# EAGLE board LightDiming2 (EAGLE 9.5.1)
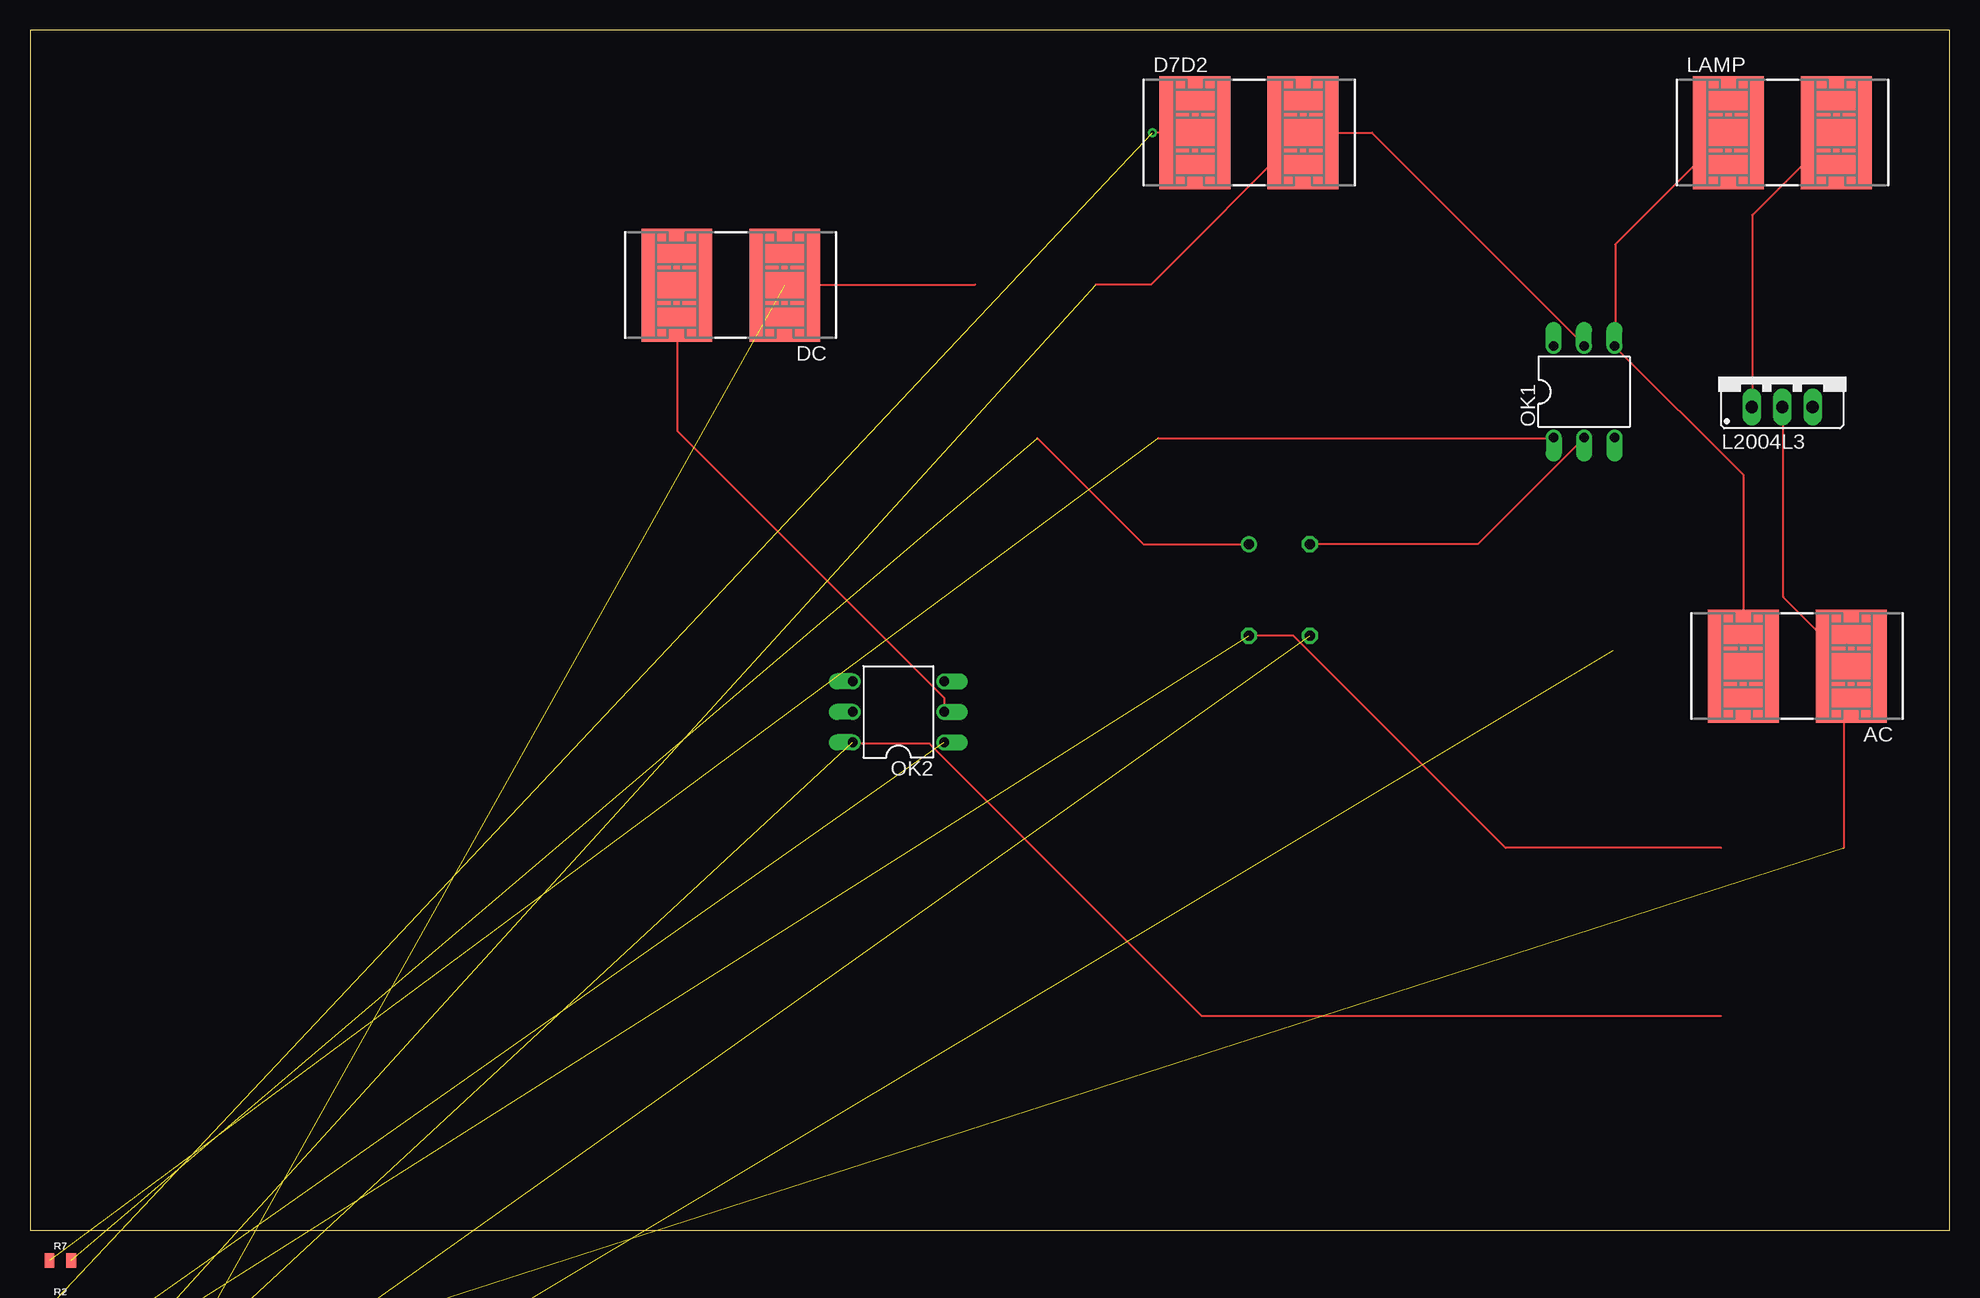
[diagram p0: board, top side]
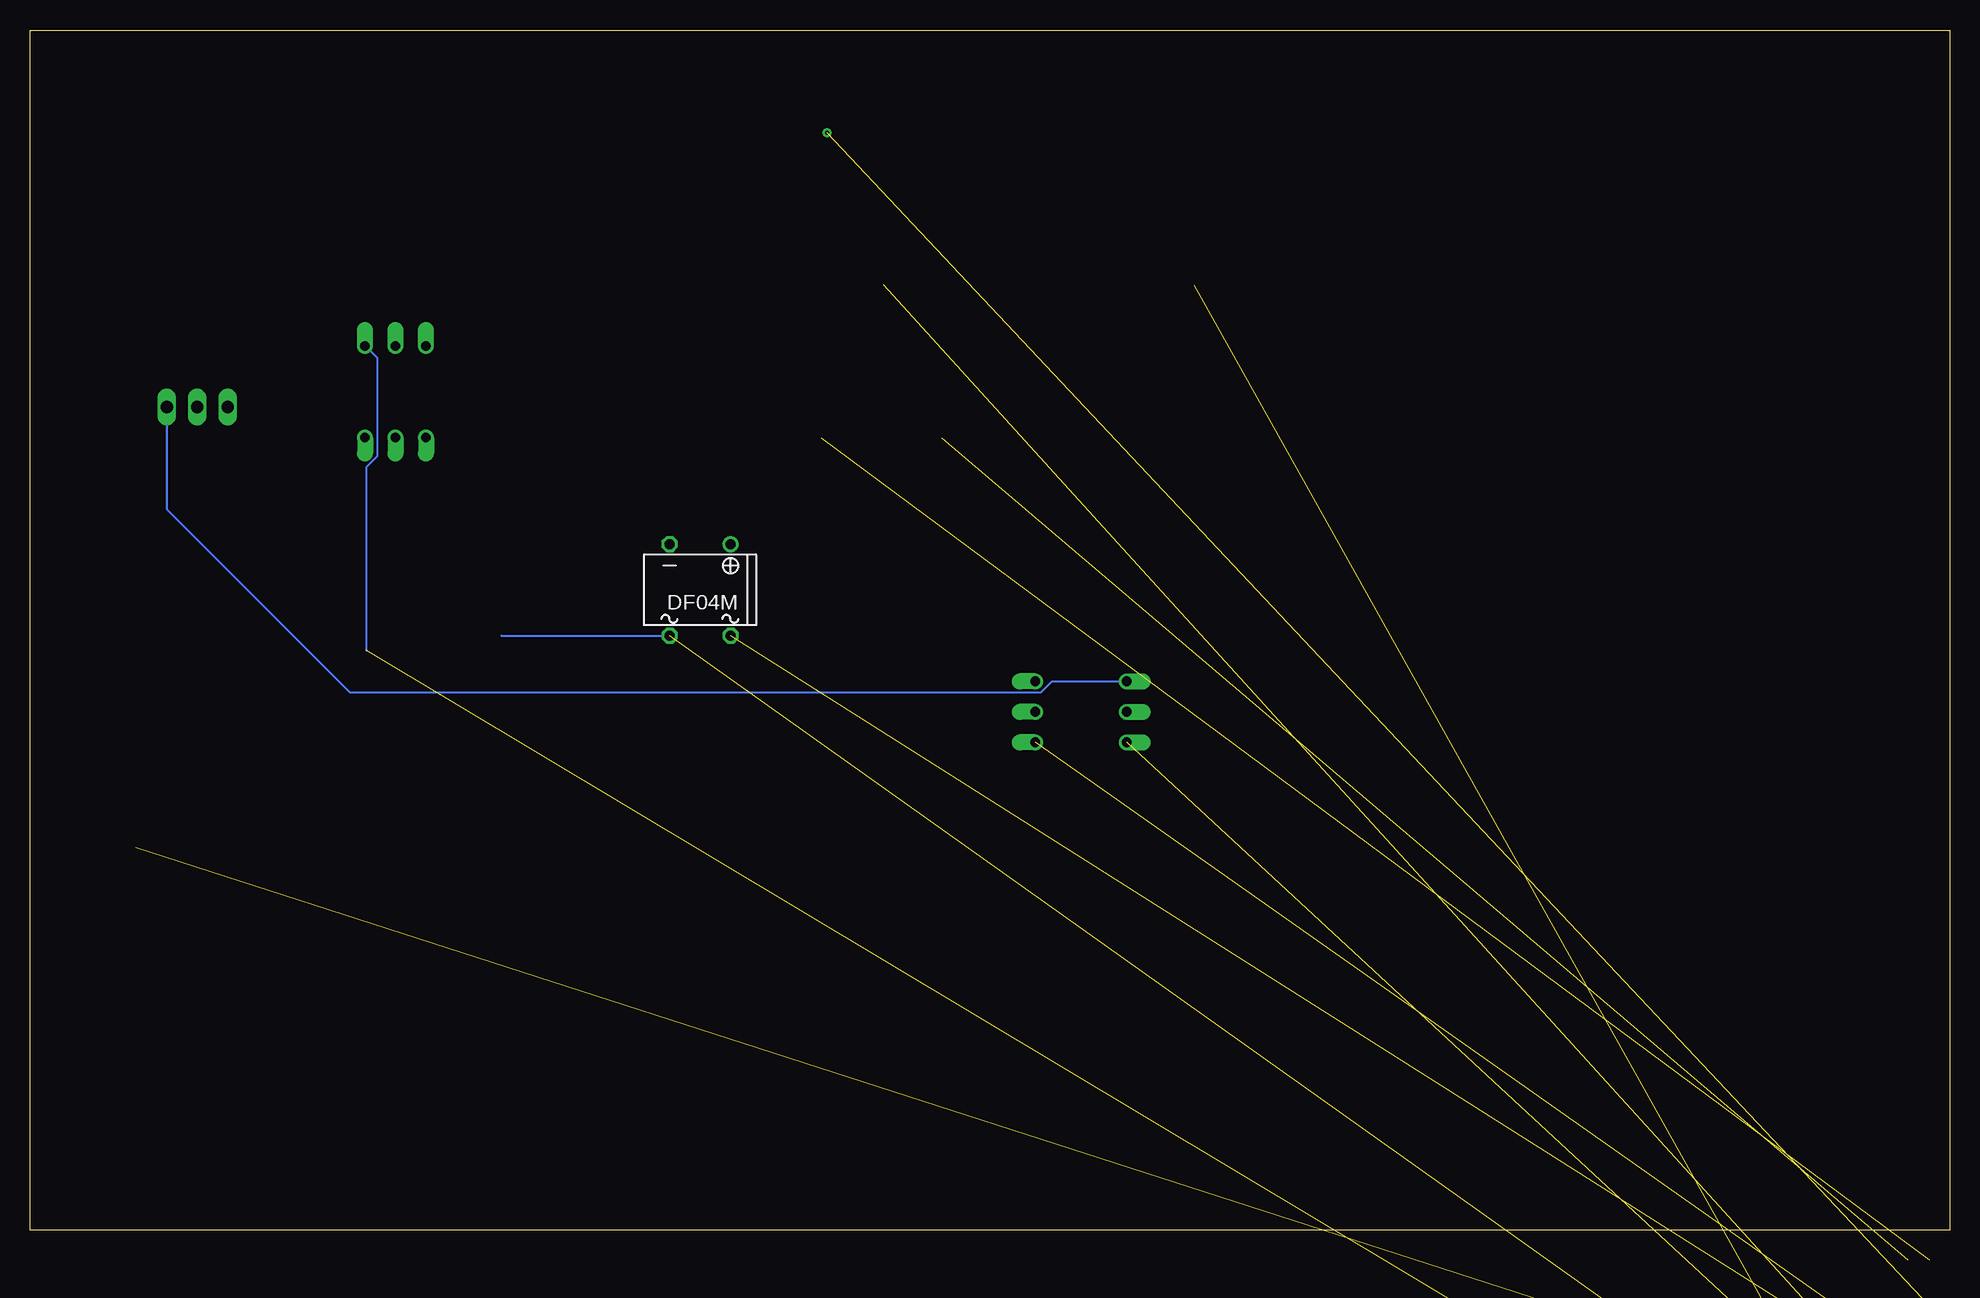
[diagram p1: board, bottom side, seen from below]

Size 160 x 100 mm. Coordinates in mm from the lower left corner, seen from the top.
Outline: 0,0 160,0 160,100 0,100 0,0
Copper layers (1*16): Top 0.035mm / dielectric 1.5mm / Bottom 0.035mm
Design rules "default": minimum track width 6mil, minimum drill 0.35mm, track to track 6mil, track to pad 6mil, pad to pad 6mil, via to via 6mil, smd to smd 6mil, copper to edge 40mil, drill to drill 6mil, minimum pad ring 10mil, minimum via ring 8mil, stop-mask expansion 4mil, vias tented up to drill 0mil, thermal gap 10mil

## Footprints (pad centres in the part's own frame; a part is rotated, then mirrored left to right if it is on the bottom)
009177002 = smd 5.9 x 9.4: 1 -4.5,0; 2 4.5,0
LED-1206 = smd 1.2 x 1.4: A -1.5,0; C 1.5,0
B-DIL = drill 0.813: + -2.54,-3.81 | drill 0.813 octagon: - 2.54,-3.81; AC1 2.54,3.81; AC2 -2.54,3.81
TO220DS = drill 1.016 long: A1 -2.54,-2.54; A2 0,-2.54; G 2.54,-2.54
DIL06 = drill 0.813 offset: 1 -2.54,-3.81; 2 0,-3.81; 3 2.54,-3.81; 4 2.54,3.81; 5 0,3.81; 6 -2.54,3.81
AXIAL-0.3 = drill 0.9 pad 1.88: P$1 -3.81,0; P$2 3.81,0
0805 = smd 0.8 x 1.2: 1 -0.9,0; 2 0.9,0

## Placement (x,y rotation side)
AC  009177002  [009177002]  147.32,46.99 180 top
D1  [LED-1206]  2.54,-10.16 0 top  (outside the outline)
D7D2  009177002  [009177002]  101.6,91.44 0 top
DC  009177002  [009177002]  58.42,78.74 180 top
DF04M  12V  [B-DIL]  104.14,53.34 180 bottom
L2004L3  TIC225S  [TO220DS]  146.05,71.12 0 top
LAMP  009177002  [009177002]  146.05,91.44 0 top
OK1  4N25M  [DIL06]  129.54,69.85 0 top
OK2  MOC3021M  [DIL06]  72.39,43.18 90 top
R1  1k  [AXIAL-0.3]  5.08,-17.78 0 top  (outside the outline)
R2  220  [0805]  2.54,-6.35 0 top  (outside the outline)
R3  1k  [AXIAL-0.3]  5.08,-21.59 0 top  (outside the outline)
R4  1k  [AXIAL-0.3]  5.08,-25.4 0 top  (outside the outline)
R6  1k  [AXIAL-0.3]  5.08,-13.97 0 top  (outside the outline)
R7  1k  [0805]  2.54,-2.54 0 top

## Library data of the parts
AC D7D2 DC LAMP = con-avx; MPN: 009177002001006; OC_FARNELL: unknown; OC_NEWARK: 09P1124
D1 = SparkFun-LED
DF04M = rectifier
L2004L3 = triac
OK1 = optocoupler; MPN: 4N25-M; OC_FARNELL: 1021349; OC_NEWARK: 98K9084
OK2 = optocoupler; MF: FAIRCHILD SEMICONDUCTOR; MPN: MOC3021-M; OC_FARNELL: 1021365; OC_NEWARK: 95B7895
R1 R3 R4 R6 = SparkFun-Resistors; PROD_ID: RES-12182
R2 R7 = SparkFun-Resistors; PROD_ID: RES-08474

## Nets
GND: AC.2 LAMP.1 OK1.4 R4.P$2
IO2: D7D2.2 OK1.5 R1.P$1
N$1: DF04M.+ R7.2
N$2: D1.A R2.2
N$3: D1.C OK2.1
N$4: D7D2.1 R2.1
N$5: DC.1 R1.P$2
N$6: OK2.6 R3.P$1
N$7: L2004L3.G OK2.4
N$8: OK1.1 R7.1
N$9: DF04M.- OK1.2
N$10: DF04M.AC1 R4.P$1
N$11: DC.2 OK2.2
N$12: AC.1 L2004L3.A2 R3.P$2 R6.P$2
N$13: DF04M.AC2 R6.P$1
N$15: L2004L3.A1 LAMP.2

## Tracks (layer width: path | path; a pad name or v marks a point on that pad's centre or on a via)
GND  (1 unrouted)
  Top 0.152: LAMP.1 141.43,91.44 132.13,82.14 132.13,73.76 OK1.4 142.8,62.94 142.8,47.09 AC.2
  Bottom 0.152: 131.98,48.31 131.98,63.55 131.06,64.47 131.06,72.69 131.98,73.61 OK1.4
IO2  (1 unrouted)
  Top 0.152: OK1.5 129.54,73.76 111.86,91.44 D7D2.2 106.07,91.44 93.42,78.79 88.85,78.79
N$1  (1 unrouted)
  Top 0.152: DF04M.+ 92.81,57.15 83.97,65.99
N$2  (1 unrouted)
N$3  (1 unrouted)
N$4  (via drill 0.35)  (1 unrouted)
  Top 0.152: D7D2.1 v93.57,91.44
N$5  (1 unrouted)
  Top 0.152: 78.79,78.79 62.94,78.79 DC.1
N$6  (1 unrouted)
  Top 0.152: 140.97,17.83 97.69,17.83 74.98,40.54 68.58,40.54 OK2.6
N$7
  Bottom 0.152: OK2.4 74.83,45.72 75.74,44.81 133.35,44.81 148.59,60.05 L2004L3.G
N$8  (1 unrouted)
  Top 0.152: 94.03,65.99 126.95,65.99 OK1.1
N$9
  Top 0.152: DF04M.- 120.7,57.15 129.54,65.99 OK1.2
N$10  (1 unrouted)
  Bottom 0.152: 120.7,49.53 DF04M.AC1
N$11
  Top 0.152: OK2.2 76.2,44.35 53.95,66.6 53.95,78.64 DC.2
N$12  (2 unrouted)
  Top 0.152: L2004L3.A2 146.15,68.58 146.15,52.73 151.79,47.09 AC.1 151.79,46.94 151.18,46.33 151.18,31.85
N$13  (1 unrouted)
  Top 0.152: DF04M.AC2 105.31,49.53 122.99,31.85 140.97,31.85
N$15
  Top 0.152: L2004L3.A1 143.56,68.58 143.56,84.58 150.42,91.44 LAMP.2